# Altium PCB F17_Kiraly_Krisztina.PcbDoc
Units mm, origin at the board's own origin, x right, y up, seen from the top; angles counter-clockwise.
Board outline 90.17 x 89.08 mm, 2 copper layers (Top Layer, Bottom Layer); 27 components, 50 nets, 205 pads, 52 vias.
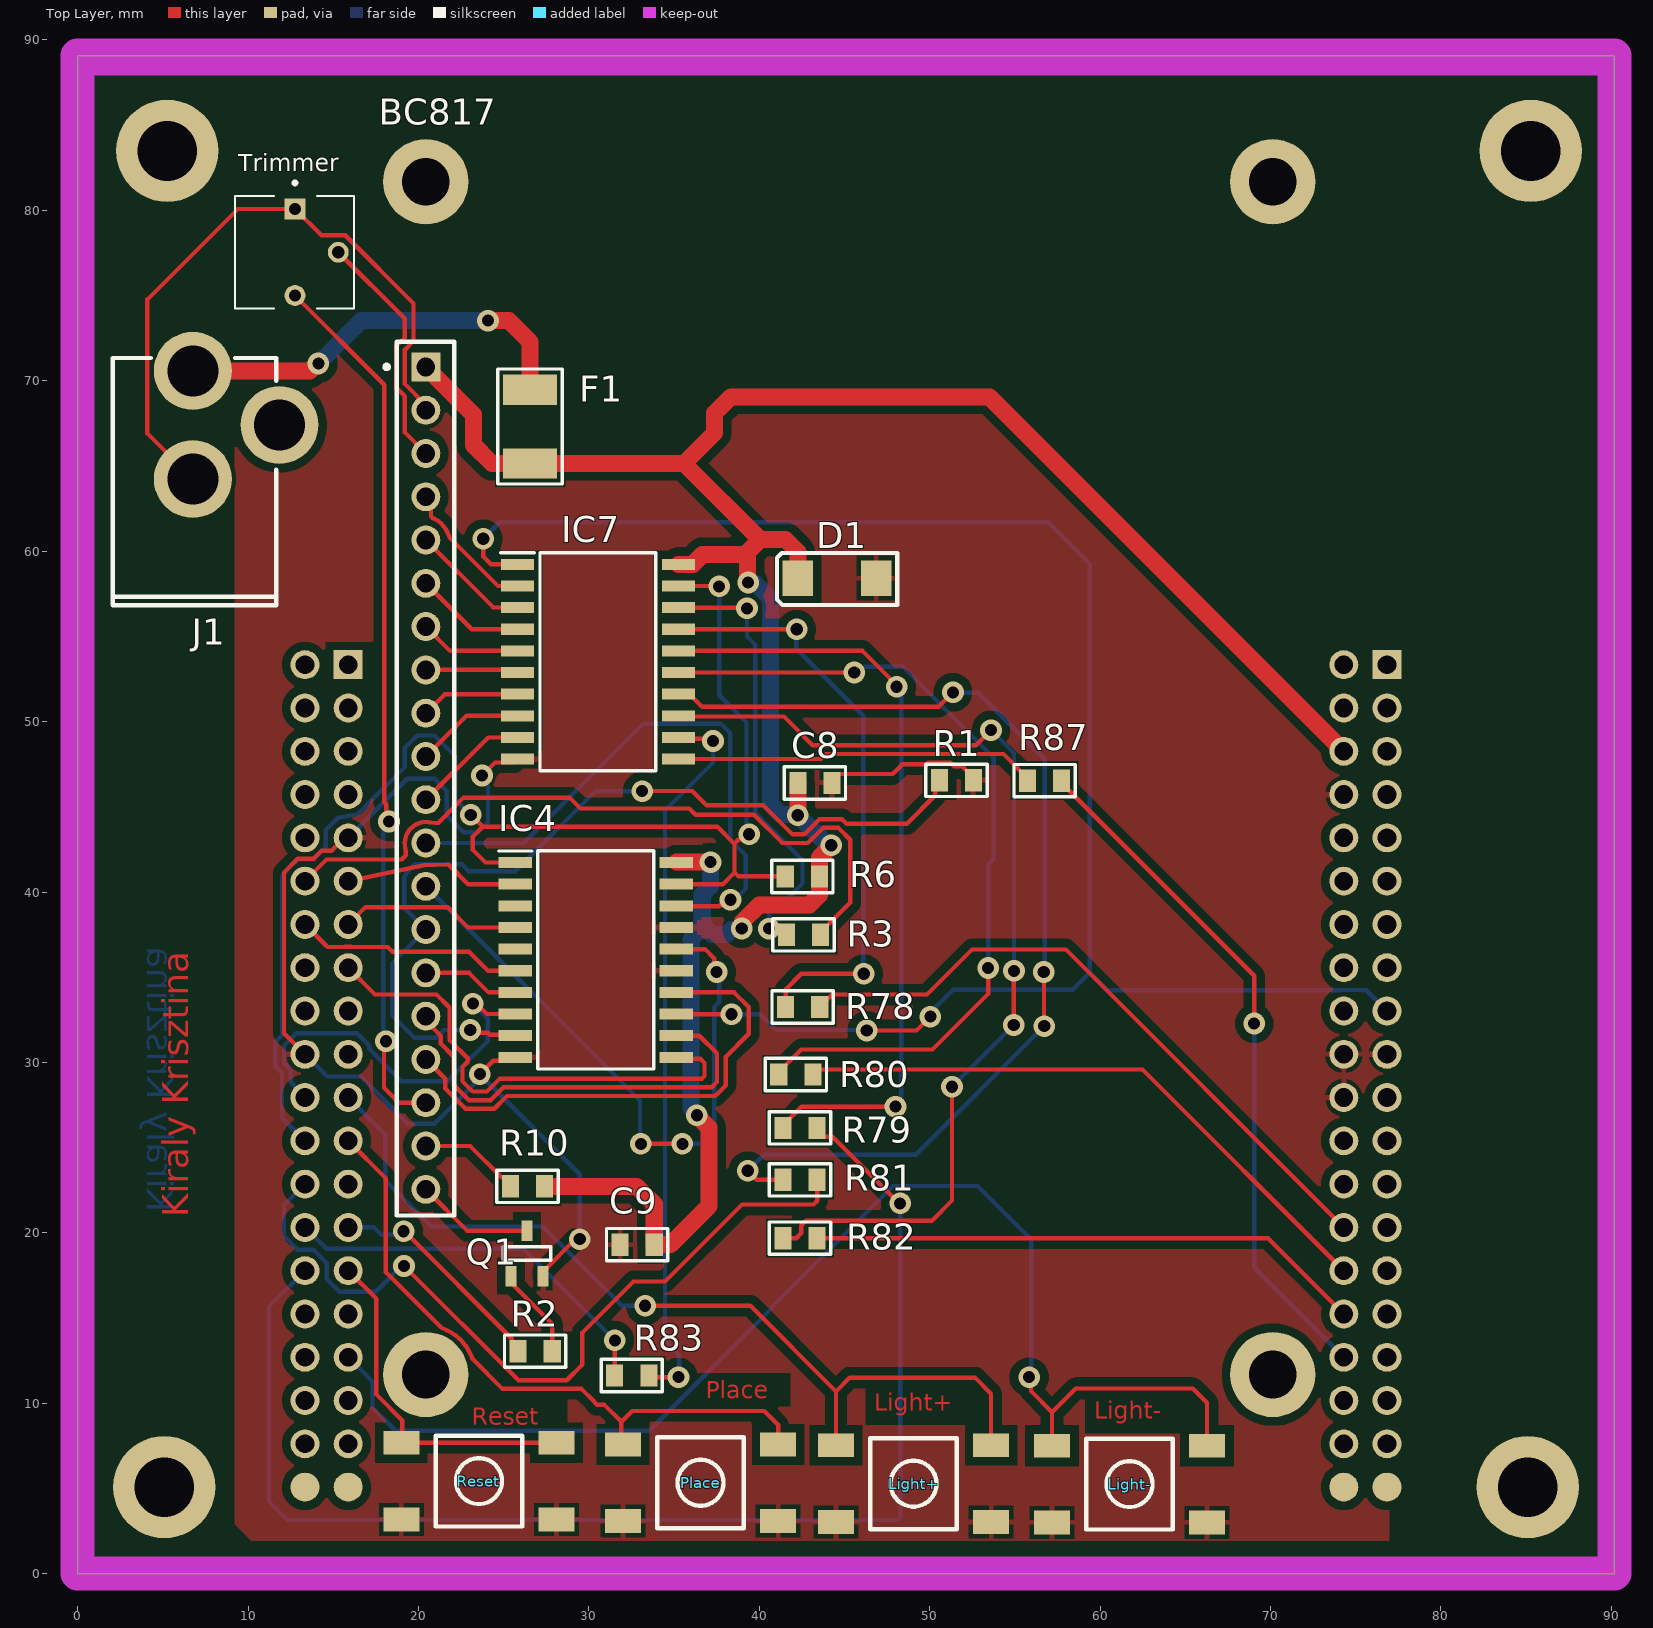
[diagram p0: Top Layer view]
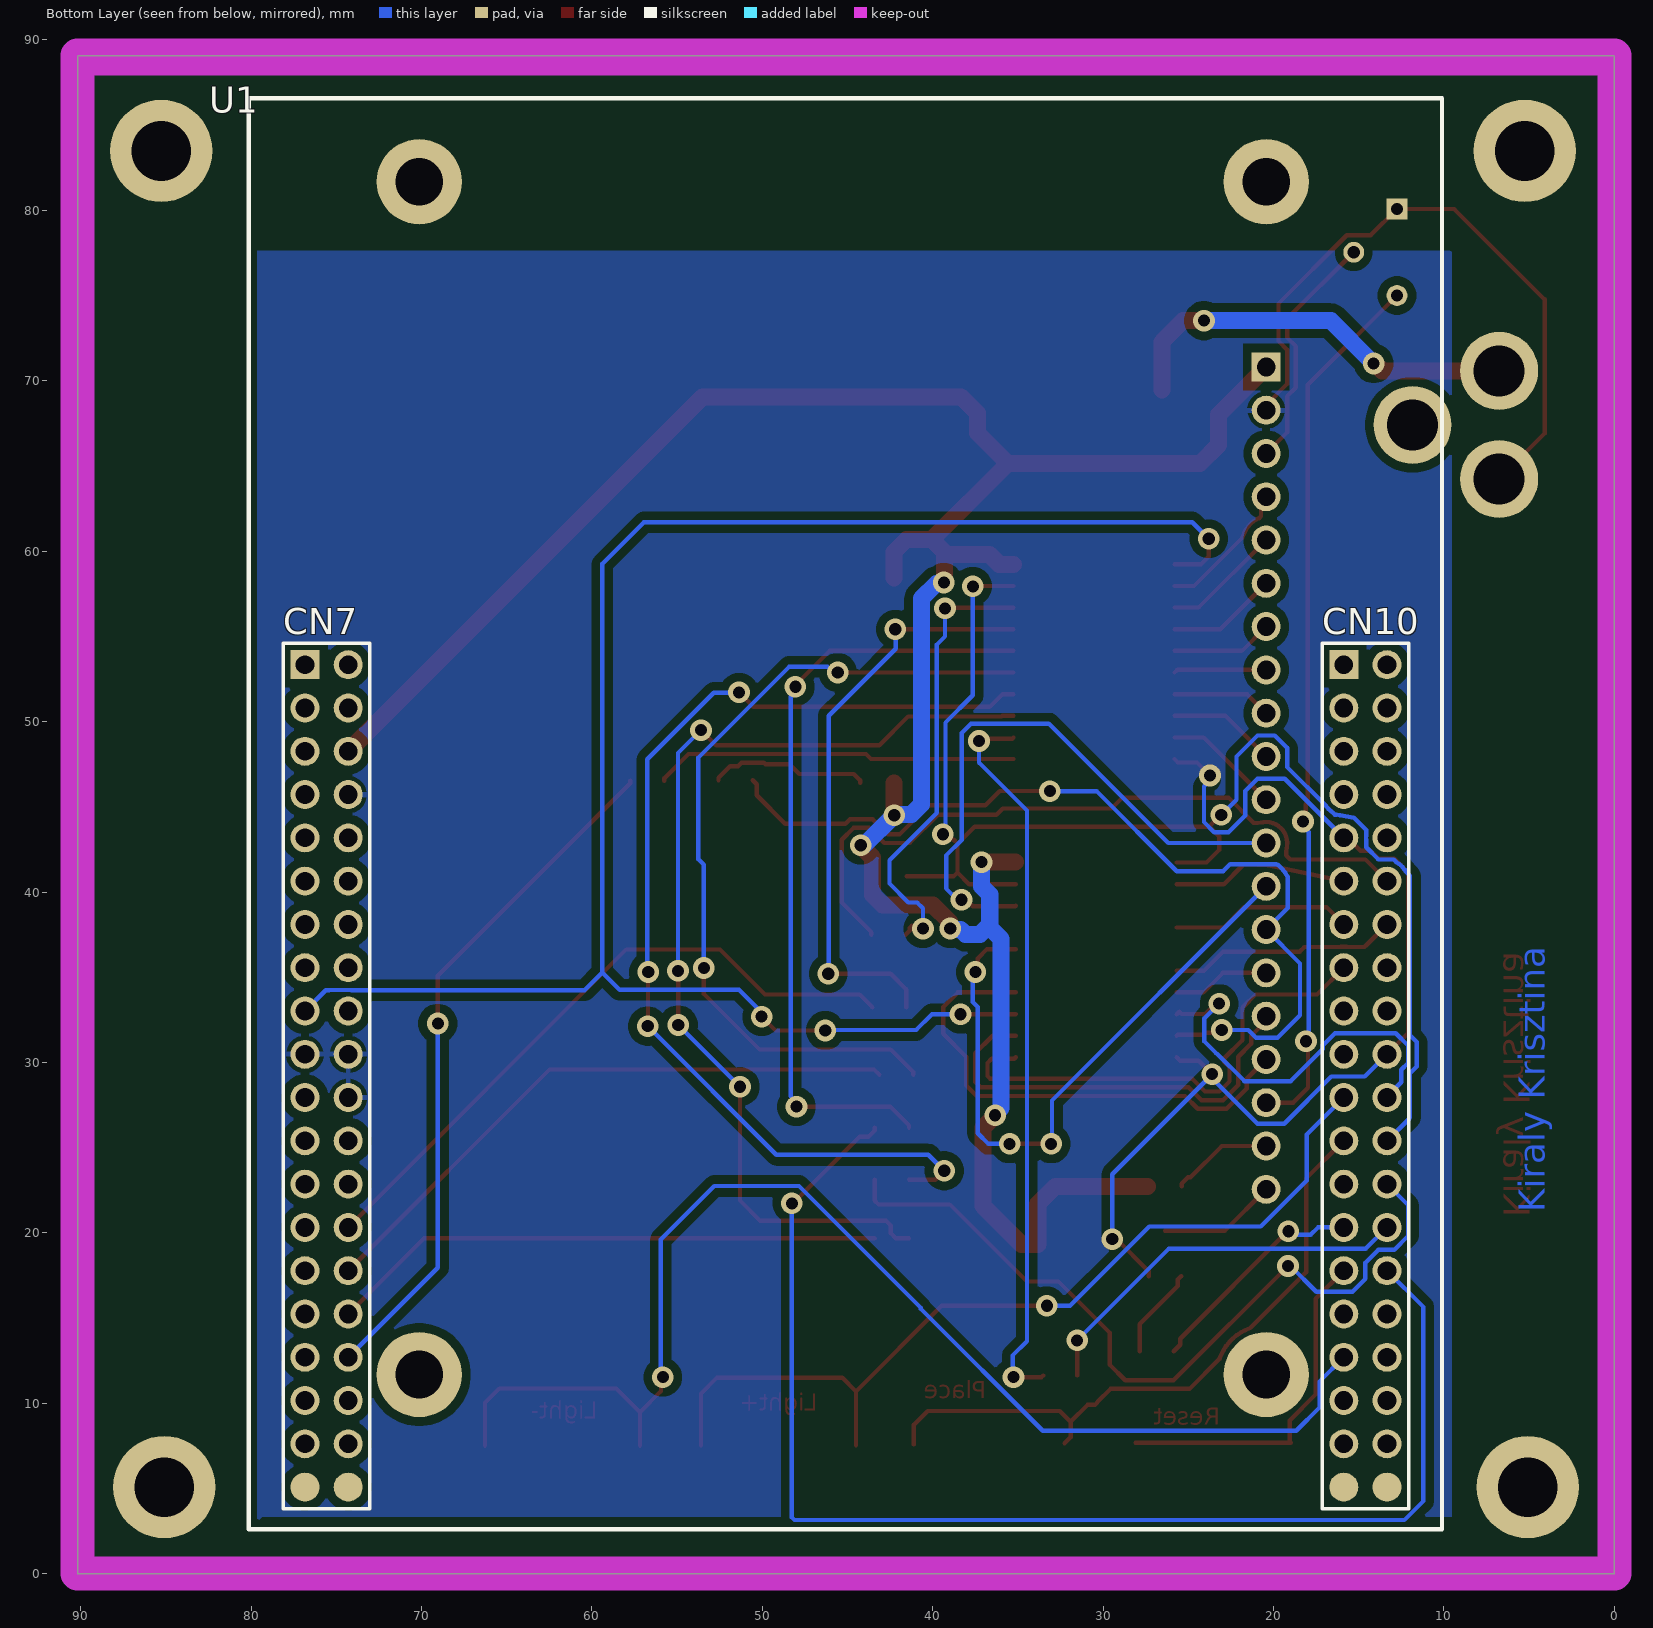
[diagram p1: Bottom Layer view, seen from below]
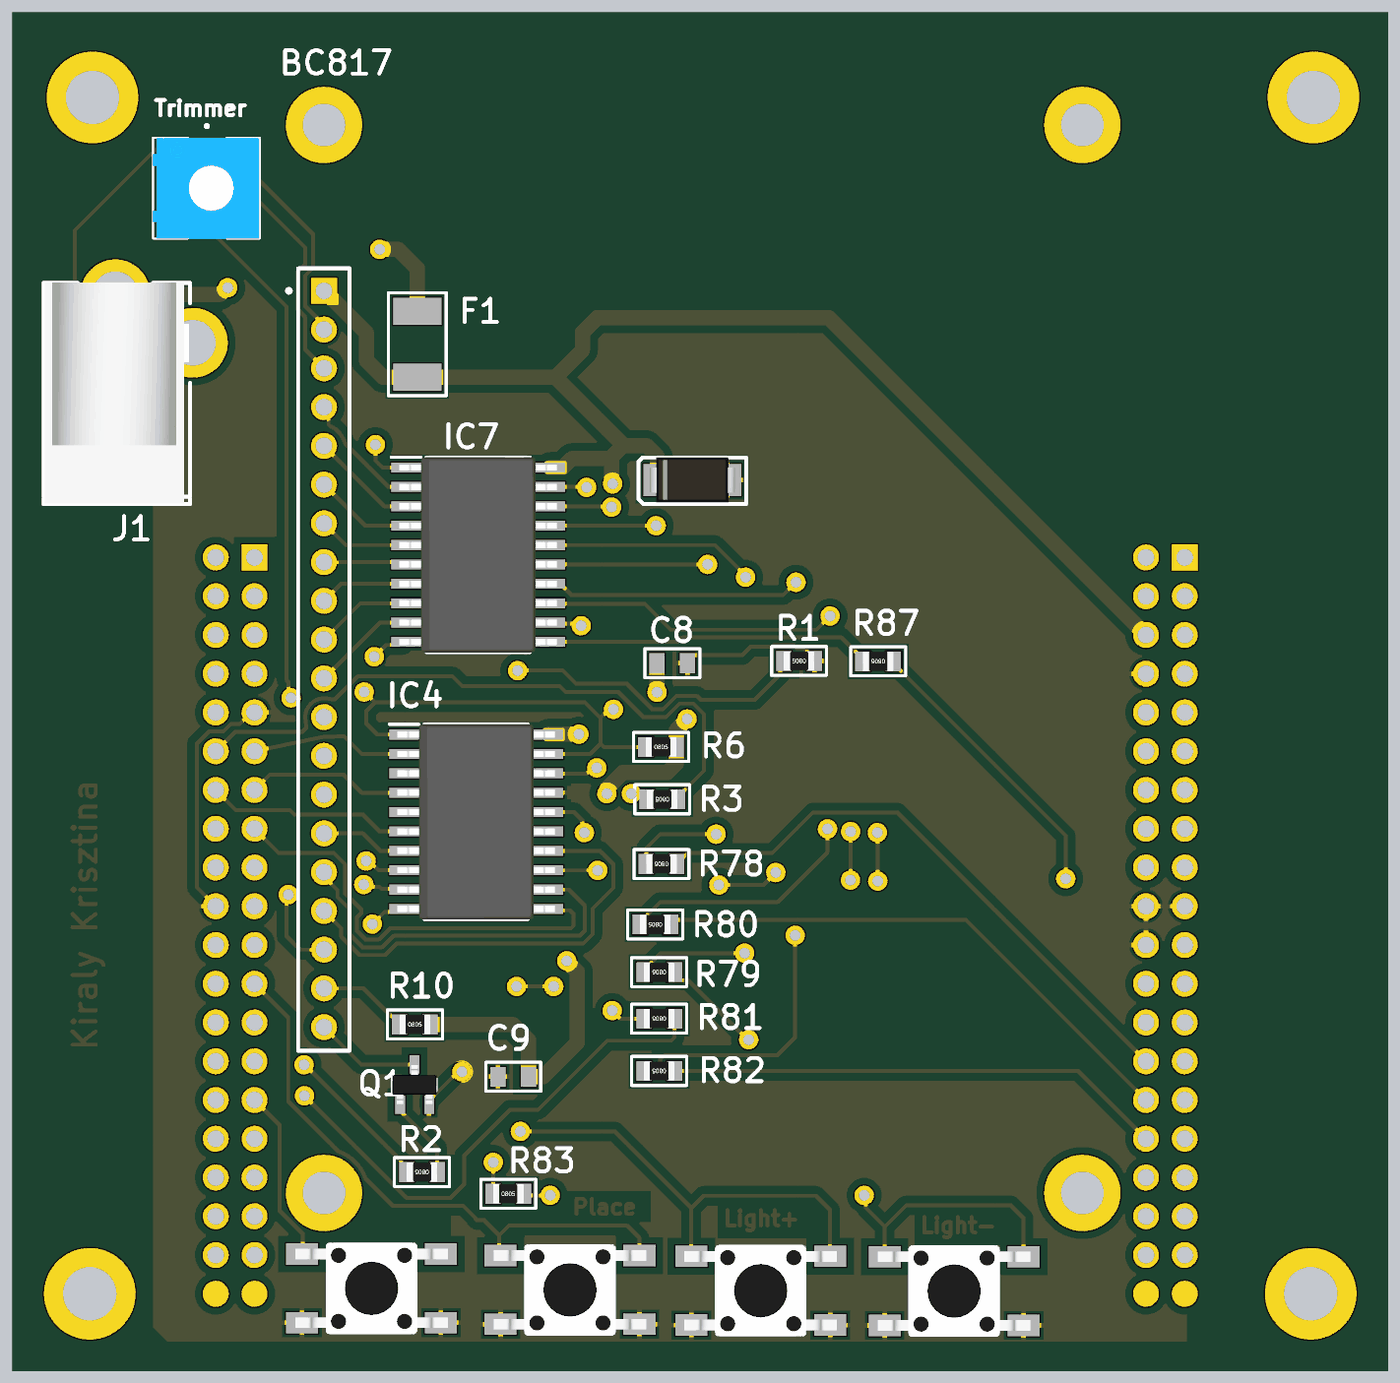
[diagram p2: 3D render of the assembled board from above, using the file's embedded part models]

## Layer stack, top to bottom
Top Solder: solder mask 0.0102, Solder Resist, Dk 3.5
Top Layer: signal copper 0.0356
Dielectric 1: dielectric 0.32, FR-4, Dk 4.8
Bottom Layer: signal copper 0.0356
Bottom Solder: solder mask 0.0102, Solder Resist, Dk 3.5

## Board outline
0,0 90.17,0 90.17,89.078 0,89.078

## Design rules (kind name [scope] priority, off if disabled: settings)
BoardOutlineClearance [All] p1: gap=0.5 ignorepadtopadclearanceinfootprint=FALSE
Clearance [All] p1: gap=0.254 ignorepadtopadclearanceinfootprint=FALSE except(0.508: Arc-Poly Track-Poly SMDPad-Poly THPad-Poly Via-Poly Fill-Poly Poly-Poly)
ComponentClearance [All] p1: gap=0.254 collisioncheckmode=3 verticalgap=0.2 showdistances=FALSE donotcheckwithout3dbody=TRUE
DiffPairsRouting [All] p1: maxlimit=0.25 minlimit=0.25 mostfreqgap=0.25 toplayer_minwidth=0.3 toplayer_maxwidth=0.38 toplayer_prefwidth=0.38 bottomlayer_minwidth=0.3 bottomlayer_maxwidth=0.38 bottomlayer_prefwidth=0.38 maxuncoupledlength=12.7
HoleSize [All] p1: absolutevalues=TRUE maxlimit=2539.975 minlimit=0.4 maxpercent=80.000 minpercent=20.000
HoleSize Via [IsVia] p2: absolutevalues=TRUE maxlimit=3.5 minlimit=0.75 maxpercent=80.000 minpercent=20.000
HoleToHoleClearance [All] p1: gap=0.25 allowstackedmicrovias=TRUE
MinimumAnnularRing [All] p1: minimumring=0.2
MinimumSolderMaskSliver [All] p1: minsoldermaskwidth=0.05
PlaneClearance [All] p1: clearance=0.5
PlaneConnect [All] p1: pad.planeconnectstyle=Relief pad.reliefexpansion=0.5 pad.reliefentries=4 pad.reliefconductorwidth=0.3 pad.reliefairgap=0.25 via.planeconnectstyle=Direct via.reliefexpansion=0.508 via.reliefentries=4 via.reliefconductorwidth=0.254 via.reliefairgap=0.254
PolygonConnect [All] p1: thpad.connectstyle=Relief thpad.reliefconductorwidth=0.3 thpad.reliefentries=4 thpad.polygonreliefangle="90 Angle" thpad.airgapwidth=0.25 smdpad.connectstyle=Relief smdpad.reliefconductorwidth=0.3 smdpad.reliefentries=4 smdpad.polygonreliefangle="90 Angle" smdpad.airgapwidth=0.25 via.connectstyle=Direct via.reliefconductorwidth=0.254 via.reliefentries=4 via.polygonreliefangle="90 Angle" via.airgapwidth=0.254
RoutingVias [All] p1: holewidth=0.711 width=1.27 viastyle="Through Hole" minholewidth=0.711 minwidth=1.143 maxholewidth=0.762 maxwidth=1.27
SilkToSilkClearance [All] p1: silktosilkclearance=0.1
SilkToSolderMaskClearance [IsPad] p1: minsilkscreentomaskgap=0.1 clearancetoexposedcopper=TRUE
SolderMaskExpansion [All] p1: expansion=0.1 istentingtop=FALSE
Width 5+ [InNet('+5')] p1: maxlimit=1 minlimit=1 preferedwidth=1 minimp=50.000000 maximp=50.000000 favimp=50.000000
Width Táp [InNet('NetF1_1')] p2: maxlimit=1 minlimit=1 preferedwidth=1 minimp=50.000000 maximp=50.000000 favimp=50.000000
Width [All] p3: maxlimit=0.254 minlimit=0.254 preferedwidth=0.254
21 further rules are at their usual default settings.

## Components (designator, comment, footprint, x,y, rotation, side; value= is the part's Value field where it differs from the comment)
BC817 "LCD Screen" FP_LCD 20.429,70.816 r270 top locked
C8 "100nF" FP_0805_CAP_085 43.256,46.406 r0 top locked
C9 "100nF" FP_0805_CAP_085 32.833,19.304 r0 top locked
D1 "9" FP_SMA 44.563,58.42 r180 top locked
F1 "Fuse" FP_MULTIFUSE 26.543,69.469 r270 top locked
IC4 "SN74HCT244DW" SOIC127P1030X265-20N 30.404,36.017 r0 top locked
IC7 "SN74HCT245DW" SOIC127P1030X265-20N 30.531,53.518 r0 top locked
J1 "2.xmm" FP_DC_TAP_ANYA 6.756,70.587 r180 top
Light+ "Button" FP_BTN_SMD 49.047,5.283 r90 top (schematic designator B3)
Light- "Button" FP_BTN_SMD 61.722,5.258 r90 top (schematic designator B2)
Place "Button" FP_BTN_SMD 36.551,5.334 r90 top (schematic designator B1)
Q1 "NMOS" FP_SOT23-3 26.365,18.79 r270 top locked
R1 "10K" FP_0805_RES 51.562,46.558 r180 top locked
R2 "1K" FP_0805_RES 26.848,13.056 r180 top locked
R3 "1K" FP_0805_RES 42.596,37.49 r180 top
R6 "100K" FP_0805_RES 42.52,40.919 r0 top
R10 "30" FP_0805_RES 26.391,22.733 r0 top locked
R78 "1K" FP_0805_RES 42.545,33.249 r180 top
R79 "1K" FP_0805_RES 42.393,26.162 r180 top locked
R80 "1K" FP_0805_RES 42.139,29.286 r180 top locked
R81 "1K" FP_0805_RES 42.393,23.114 r180 top locked
R82 "1K" FP_0805_RES 42.393,19.685 r180 top locked
R83 "1K" FP_0805_RES 32.512,11.633 r0 top locked
R87 "1K" FP_0805_RES 56.744,46.533 r180 top locked
Reset "Button" FP_BTN_SMD 23.546,5.436 r90 top (schematic designator B4)
Trimmer "" TRIM_3362P-1-502 12.751,77.546 r270 top locked
U1 "NUCLEO-F446RE" FP_NUCLEO-64_2x20 76.835,53.34 r180 bottom locked

## Footprints (in the part's own frame and the unit in brackets; to place one, negate y for a bottom-side part, rotate by r counter-clockwise, add the part's x,y. Pads: shape width x height; smd on the part's side, far side on the other; paste and mask are expansions set on the pad)
FP_0805_CAP_085 [mm] "0805 kapacitás YAGEO 0.85mm magas"
  rect 1x1.3 smd: 1(-1,0) 2(1,0)
  silkscreen extent -1.8,-0.95 1.8,0.95, body extent -1,-0.64 1.03,0.64, height 0.85
FP_0805_RES [mm] "0805 ellenállás"
  rect 1x1.3 smd: 1(-1,0) 2(1,0)
  silkscreen extent -1.8,-0.95 1.8,0.95, body extent -1,-0.62 1,0.63, height 0.62
FP_BTN_SMD [mm] "SMD Push Button 6x6mm"
  rect 1.4x2.1 smd: 1(2.25,4.55) 2(2.25,-4.55) 3(-2.25,4.55) 4(-2.25,-4.55)
  silkscreen extent -2.67,-2.54 2.67,2.54, body extent -3,-5 3,5, height 5.1
FP_DC_TAP_ANYA [mil] "DC HEBA25 TÁPFESZÜLTSÉG ALJZAT ZÁRT, NYÁKBA 90°"
  round 180 hole 118: 1(0,0) 2(0,250) 3(-200,125)
  silkscreen extent -193,-30 185,541, body extent -190,-31 183,539, height 440
FP_LCD [mm]
  rect 1.7x1.7 hole 1.1: 1(0,0)
  round 1.7 hole 1.1: 2(2.54,0) 3(5.08,0) 4(7.62,0) 5(10.16,0) 6(12.7,0) 7(15.24,0) 8(17.78,0) 9(20.32,0) 10(22.86,0) 11(25.4,0) 12(27.94,0) 13(30.48,0) 14(33.02,0) 15(35.56,0) 16(38.1,0) 17(40.64,0) 18(43.18,0) 19(45.72,0) 20(48.26,0)
  round 5 hole 2.8: ""(-10.87,49.7) ""(-10.87,0) ""(59.13,49.7) ""(59.13,0)
  silkscreen extent -1.47,-2.4 49.8,1.67, body extent -13.37,-3 61.63,52.2, height 17.6
FP_MULTIFUSE [mm] "POLYFUSE SMD 1812"
  rect 1.78x3.15 smd: 1(0,0) 2(4.318,0)
  silkscreen extent -1.22,-1.9 5.53,1.9, body extent -0.12,-1.71 4.57,1.71, height 1
FP_NUCLEO-64_2x20 [mm]
  round 1.7 all layers, no hole: 0(0,-48.26) 0(2.54,-48.26) 0(60.96,-48.26) 0(63.5,-48.26)
  rect 1.7x1.7 hole 1.1: 1(0,0) 39(60.96,0)
  round 1.7 hole 1.1: 2(2.54,0) 3(0,-2.54) 4(2.54,-2.54) 5(0,-5.08) 6(2.54,-5.08) 7(0,-7.62) 8(2.54,-7.62) 9(0,-10.16) 10(2.54,-10.16) 11(0,-12.7) 12(2.54,-12.7) 13(0,-15.24) 14(2.54,-15.24) 15(0,-17.78) 16(2.54,-17.78) 17(0,-20.32) 18(2.54,-20.32) 19(0,-22.86) 20(2.54,-22.86) 21(0,-25.4) 22(2.54,-25.4) 23(0,-27.94) 24(2.54,-27.94) 25(0,-30.48) 26(2.54,-30.48) 27(0,-33.02) 28(2.54,-33.02) 29(0,-35.56) 30(2.54,-35.56) 31(0,-38.1) 32(2.54,-38.1) 33(0,-40.64) 34(2.54,-40.64) 35(0,-43.18) 36(2.54,-43.18) 37(0,-45.72) 38(2.54,-45.72) 40(63.5,0) 41(60.96,-2.54) 42(63.5,-2.54) 43(60.96,-5.08) 44(63.5,-5.08) 45(60.96,-7.62) 46(63.5,-7.62) 47(60.96,-10.16) 48(63.5,-10.16) 49(60.96,-12.7) 50(63.5,-12.7) 51(60.96,-15.24) 52(63.5,-15.24) 53(60.96,-17.78) 54(63.5,-17.78) 55(60.96,-20.32) 56(63.5,-20.32) 57(60.96,-22.86) 58(63.5,-22.86) 59(60.96,-25.4) 60(63.5,-25.4) 61(60.96,-27.94) 62(63.5,-27.94) 63(60.96,-30.48) 64(63.5,-30.48) 65(60.96,-33.02) 66(63.5,-33.02) 67(60.96,-35.56) 68(63.5,-35.56) 69(60.96,-38.1) 70(63.5,-38.1) 71(60.96,-40.64) 72(63.5,-40.64) 73(60.96,-43.18) 74(63.5,-43.18) 75(60.96,-45.72) 76(63.5,-45.72)
  silkscreen extent -3.3,-50.72 66.72,33.25, body extent -3.3,-50.72 66.72,33.25, height 11
FP_SMA [mm] "SMA footprint"
  rect 1.8x2.1 smd: 1(-2.3,0) 2(2.3,0)
  silkscreen extent -3.52,-1.48 3.52,1.58, body extent -2.8,-1.47 2.8,1.48, height 2.7
FP_SOT23-3 [mm] "SOT23-3 tok"
  rect 1.2x0.65 smd: 1(1.327,-0.95) 2(1.327,0.95) 3(-1.327,0)
  silkscreen extent -0.4,-1.4 0.4,1.4, body extent -1.27,-1.46 1.27,1.46, height 0.97
SOIC127P1030X265-20N [mm]
  rect 1.95x0.65 smd: 1(-4.725,5.715) 2(-4.725,4.445) 3(-4.725,3.175) 4(-4.725,1.905) 5(-4.725,0.635) 6(-4.725,-0.635) 7(-4.725,-1.905) 8(-4.725,-3.175) 9(-4.725,-4.445) 10(-4.725,-5.715) 11(4.725,-5.715) 12(4.725,-4.445) 13(4.725,-3.175) 14(4.725,-1.905) 15(4.725,-0.635) 16(4.725,0.635) 17(4.725,1.905) 18(4.725,3.175) 19(4.725,4.445) 20(4.725,5.715)
  silkscreen extent -5.7,-6.4 3.4,6.4, body extent -5.16,-6.4 5.16,6.4, height 1.75
TRIM_3362P-1-502 [mm]
  rect 1.222x1.222 hole 0.714: 1(-2.54,0)
  round 1.222 hole 0.714: 2(0,2.54) 3(2.54,0)
  silkscreen extent -4.16,-3.53 3.3,3.47, body extent -3.3,-3.55 3.3,3.44, height 4.88

## Part data
C8 C9: library part CAP, "Capacitor", Name="100nF 0805 10% 50V X7R 0805B104K500NT (FNG)", Reference=82-13-46, Supplier=Lomex
D1: library part ZENER, "Zener Diode", Name="VISHAY SMAJ5.0A-E3/61", Reference=9550941, Supplier=Farnell, U_Z=24
IC4: "Integrated Circuit", Manufacturer_Name="Texas Instruments", Mouser Part Number=595-SN74HCT244DW, Arrow Part Number=SN74HCT244DW, Arrow Price/Stock=https://www.arrow.com/en/products/sn74hct244dw/texas-instruments?region=nac, Datasheet Link=http://www.ti.com/lit/ds/symlink/sn74hct244.pdf, Height=2.65mm, Manufacturer_Part_Number=SN74HCT244DW, Mouser Price/Stock=https://www.mouser.co.uk/ProductDetail/Texas-Instruments/SN74HCT244DW?qs=8yeEWhuAOtPaf02S2l6zdA%3D%3D, Name="TEXAS INSTRUMENTS SN74HCT244DWR", Reference=3006172, Supplier=Farnell
IC7: "Integrated Circuit", Manufacturer_Name="Texas Instruments", Mouser Part Number=595-SN74HCT245DW, Arrow Part Number=SN74HCT245DW, Arrow Price/Stock=https://www.arrow.com/en/products/sn74hct245dw/texas-instruments?region=nac, Datasheet Link=http://www.ti.com/lit/ds/symlink/sn74hct245.pdf, Height=2.65mm, Manufacturer_Part_Number=SN74HCT245DW, Mouser Price/Stock=https://www.mouser.co.uk/ProductDetail/Texas-Instruments/SN74HCT245DW?qs=5h8QSfodyRguwsnqzMvAgw%3D%3D, Name="74HCT245D (NXP) 8xBIDIRECTIONAL BUS TRANSCEIVER 3-STATE OUTPUT SO-20 WIDE", Reference=87-06-35, Supplier=Lomex
J1: library part DC_TAP_ANYA, "2.xmm DC HEBA25 TÁPFESZÜLTSÉG ALJZAT ZÁRT, NYÁKBA 90°", Name="TÁP DC ANYA 5.5/2.1/9.5mm DCS-5521-5", Reference=43-07-67, Supplier=Lomex
Light+ Light- Place Reset: library part "Button 4P", "Push button", Name="ALCOSWITCH - TE CONNECTIVITY FSM1LPTR", Reference=2610937, Supplier=Farnell
Q1: "NXP - BSP030,115 - MOSFET, N CH, 30V, 10A, SOT223", Name="2N7002 (NXP) N-FET 60V 0.3A 0.83W Rds<5R SOT-23 ˝12W˝ (SN7002)", Reference=86-00-97, Supplier=Lomex
R1 R2 R3 R6 R10 R78 R79 R80 R81 R82 R83 R87: library part RES, "Resistor", Supplier=Lomex
  R1: Name="10K0 0805 5% RS-05K103JT 0.125W (FNG)", Reference=81-35-05
  R2 R3 R78 R79 R80 R81 R82 R83 R87: Name="1K00 0805 5% CR-05JL7----1K 0.125W (VIK)", Reference=81-10-87
  R6: Name="100K 0805 5% CR-05JL7--100K 0.125W (VIK)", Reference=81-11-11
  R10: Name="30R0 0805 5% WR08X300JTL 0.125W (WAL)", Reference=81-29-89
Trimmer: library part Trimmer, Name="5K00 3362P-502R (KIC) 6.6x7mm 1#-1# CERMET FEKVÖ", Reference=05-06-68, Supplier=Lomex
BC817: Name=RG12864A-BIW-V, Reference=TME, Supplier=Tanszék
F1: Name="1.1A 33V 1812L110/33MR POLYFUSE SMD 1812 (LFS) ˝LF110-33˝", Reference=44-03-25, Supplier=Lomex
U1: Name="Nucleo F446RE", Reference=NUCLEO, Supplier=Tanszék

## Free pads (board coordinates)
  round 6 hole 3.5: ""(5.08,5.08) ""(5.258,83.49) ""(85.09,5.08) ""(85.268,83.49)

## Via types
v1: diameter 1.27, hole 0.711, Top Layer to Bottom Layer, 52 vias

## Nets (pads, with @x,y where several pads share a name; then routed paths per layer and width w, separated by ;. In a path a pad name is that pad's centre, name@x,y a point inside that pad or via, vN(x,y) a via of type N, cw(c..) or ccw(c..) an arc to the next point about the centre after c; other vN are vias at no path point)
+5: BC817.1 C8.1 C9.2 D1.2 F1.2 IC4.20 IC7.20 R6.2 R10.2 U1.6 | length 153.8
  Top Layer w1: BC817.1 23.216,68.03 23.216,66.243 24.308,65.151 F1.2 35.585,65.151 ; R10.2 32.791,22.733 33.833,21.692 C9.2 34.773,19.304 37.033,21.565 37.033,26.178 36.335,26.876 v1(36.335,26.899) ; IC4.20@35.153,41.757 v1(37.134,41.757) ; IC7.20 36.093,59.233 36.678,59.817 39.192,59.817 ; v1(38.964,37.858) 39.016,37.909 39.016,38.266 39.994,39.243 42.934,39.243 43.52,39.829 R6.2 43.52,42.013 44.221,42.715 v1(44.221,42.748) ; v1(39.345,58.166) 39.293,58.218 39.293,59.716 39.192,59.817 ; v1(42.256,44.506) C8.1 ; D1.2 42.263,59.947 41.529,60.681 40.056,60.681 ; U1.6 53.492,69.063 38.329,69.063 37.363,68.097 37.363,66.929 35.585,65.151 ; 35.585,65.151 40.056,60.681 ; 39.192,59.817 40.056,60.681
  Bottom Layer w1: v1(36.335,26.899) 36.335,26.972 35.979,27.327 35.979,37.244 36.741,38.005 ; v1(37.134,41.757) 37.134,40.341 36.648,39.855 36.648,38.098 36.741,38.005 ; v1(38.964,37.858) 38.913,37.806 38.356,37.806 38.063,37.512 37.234,37.512 36.741,38.005 ; v1(39.345,58.166) 39.396,58.114 39.77,58.114 40.665,57.219 40.665,45.144 41.251,44.558 42.205,44.558 v1(42.256,44.506) ; v1@42.234,44.418 42.344,44.418 43.963,42.8 44.17,42.8 v1(44.221,42.748)
GND: BC817.2 C8.2 C9.1 D1.1 IC4.10 IC4.15 IC4.17 IC7.10 J1.2 Light+.3 Light+.4 Light-.3 Light-.4 Place.3 Place.4 Q1.2 R1.1 Reset.3 Reset.4 Trimmer.1 U1.8 U1.19 U1.20 U1.22 U1.47 U1.58 | length 112.9
  Top Layer w0.254: J1.2 4.089,66.904 4.089,74.778 9.398,80.086 Trimmer.1 14.299,78.538 15.702,78.538 19.706,74.533 19.706,72.332 19.198,71.824 19.198,69.809 20.429,68.578 BC817.2 BC817.2@20.649,68.276 ; U1.58 12.104,31.711 12.104,41.15 12.903,41.949 13.845,41.949 14.314,42.418 14.896,42.418 15.658,43.18 U1.47 ; v1(23.597,29.312) 24.389,30.104 25.481,30.104 IC4.10 ; v1@23.876,46.685 v1(23.724,46.838) 24.491,47.605 25.608,47.605 IC7.10 ; Q1.2 27.315,17.738 29.212,19.634 v1(29.464,19.634) ; C8.2 44.256,46.556 44.629,46.929 47.825,46.929 48.394,47.498 49.813,47.498 49.904,47.589 51.22,47.589 51.424,47.385 51.885,47.385 52.562,46.708 R1.1
  Bottom Layer w0.254: U1.58 14.644,29.171 16.604,29.171 19.37,26.405 20.939,26.405 23.597,29.063 v1(23.597,29.312) 29.464,23.444 v1(29.464,19.634) ; U1.47 19.342,46.647 20.939,46.647 21.66,45.926 21.66,44.492 22.642,43.51 23.484,43.51 24.079,44.105 24.079,46.207 23.724,46.563 v1(23.724,46.838)
NetBC817_3: BC817.3 Trimmer.2 | length 14.4
  Top Layer w0.254: Trimmer.2 19.198,73.639 19.198,72.543 18.69,72.035 18.69,69.598 19.198,69.09 19.198,66.967 BC817.3
NetBC817_4: BC817.4 IC7.2 | length 8.1
  Top Layer w0.254: BC817.4 20.729,62.896 20.729,62.049 20.842,61.936 cw(c20.452,60.771) 21.329,61.632 cw(c19.842,60.173) 21.821,60.825 21.83,60.797 21.873,60.754 24.663,57.963 IC7.2
NetBC817_5: BC817.5 IC7.3 | length 7
  Top Layer w0.254: BC817.5 24.393,56.693 IC7.3
NetBC817_6: BC817.6 IC7.4 | length 6.5
  Top Layer w0.254: BC817.6 23.123,55.423 IC7.4
NetBC817_7: BC817.7 IC7.5 | length 6
  Top Layer w0.254: BC817.7 21.853,54.153 IC7.5
NetBC817_8: BC817.8 IC7.6 | length 5.4
  Top Layer w0.254: BC817.8 25.652,53.036 IC7.6
NetBC817_9: BC817.9 IC7.7 | length 5.8
  Top Layer w0.254: BC817.9 21.546,51.613 IC7.7
NetBC817_10: BC817.10 IC7.8 | length 6.4
  Top Layer w0.254: BC817.10 22.816,50.343 IC7.8
NetBC817_11: BC817.11 IC7.9 | length 6.9
  Top Layer w0.254: BC817.11 24.086,49.073 IC7.9
NetBC817_12: BC817.12 IC4.18 | length 35
  Top Layer w0.254: IC4.18 35.161,39.16 37.643,39.16 38.032,39.549 v1(38.307,39.549)
  Bottom Layer w0.254: BC817.12 26.176,42.876 33.18,49.881 37.749,49.881 38.298,49.332 38.298,43.054 39.211,42.142 39.211,40.214 38.547,39.549 v1(38.307,39.549)
NetBC817_13: BC817.13 IC4.16 | length 37.9
  Top Layer w0.254: v1(33.045,25.222) v1(35.484,25.222) ; IC4.16 36.806,36.652 37.357,36.102 37.357,35.439 v1(37.49,35.306)
  Bottom Layer w0.254: BC817.13 32.995,27.771 32.995,25.273 v1(33.045,25.222) ; v1(35.484,25.222) 36.728,25.222 37.351,25.845 37.351,33.25 37.644,33.544 37.644,35.152 v1(37.49,35.306)
NetBC817_14: BC817.14 IC4.9 R1.2 | length 54.4
  Top Layer w0.254: v1(23.038,31.902) 23.19,31.75 24.054,31.75 24.181,31.623 25.628,31.623 IC4.9 ; v1(33.122,45.923) 33.133,45.934 36.065,45.934 36.914,45.085 40.241,45.085 41.943,43.383 42.636,43.383 43.525,44.272 44.853,44.272 45.126,43.999 48.647,43.999 50.324,45.676 50.324,46.32 R1.2
  Bottom Layer w0.254: v1(23.038,31.902) 21.478,31.902 21.021,31.445 19.761,31.445 18.44,32.766 18.44,35.807 BC817.14 19.234,38.992 19.159,39.066 19.159,40.813 19.159,40.873 19.187,40.927 cw(c19.413,40.813) 19.188,40.93 cw(c21.072,39.939) 19.711,41.576 cw(c19.873,41.38) 19.873,41.634 22.545,41.634 22.954,41.224 25.679,41.224 30.378,45.923 v1(33.122,45.923)
NetBC817_16: BC817.16 IC4.12 | length 25.5
  Top Layer w0.254: BC817.16 20.429,32.434 21.311,31.553 21.311,31.423 21.311,31.376 21.311,31.1 22.073,30.338 22.073,28.68 22.965,27.788 24.228,27.788 24.983,28.543 36.844,28.543 36.851,28.55 37.205,28.55 37.512,28.857 37.512,30.535 36.474,31.572 IC4.12
NetBC817_17: BC817.17 IC4.14 | length 29.5
  Top Layer w0.254: BC817.17 21.565,29.041 21.565,28.47 22.755,27.28 24.438,27.28 25.194,28.035 37.408,28.035 38.024,28.651 38.024,30.328 39.383,31.687 39.383,33.25 38.521,34.112 IC4.14
NetBC817_18: BC817.18 Trimmer.3 | length 51.9
  Top Layer w0.254: Trimmer.3 17.983,69.774 17.983,45.281 18.11,45.154 18.11,44.298 v1(18.27,44.138) ; v1(18.09,31.242) 17.971,31.122 17.971,28.511 18.846,27.636 BC817.18
  Bottom Layer w0.254: v1(18.09,31.242) 17.932,31.4 17.932,43.526 18.27,43.863 v1(18.27,44.138)
NetBC817_19: BC817.19 R10.1 | length 6
  Top Layer w0.254: BC817.19 23.028,25.096 24.866,23.258 25.016,23.258 25.391,22.883 R10.1
NetBC817_20: BC817.20 Q1.3 | length 6.9
  Top Layer w0.254: BC817.20 22.868,20.117 Q1.3
NetF1_1: F1.1 J1.1 | length 25
  Top Layer w1: J1.1 13.618,70.587 14.049,71.018 v1(14.122,71.018) ; v1(24.079,73.533) 25.298,73.533 26.543,72.288 F1.1
  Bottom Layer w1: J1.1 J1.1@7.137,70.967 ; v1@14.071,70.967 v1(14.122,71.018) 16.637,73.533 v1(24.079,73.533)
NetIC4_1: IC4.1 IC4.19 IC7.19 R6.1 U1.62 | length 83.4
  Top Layer w0.254: v1(23.063,44.526) 23.089,44.526 23.774,43.84 ; IC4.1 23.927,41.732 23.19,42.469 23.19,43.256 23.774,43.84 ; IC4.19 37.861,40.462 38.546,41.147 ; IC7.19 37.617,57.963 v1(37.643,57.937) ; 38.545,42.826 37.531,43.84 23.774,43.84 ; v1(39.401,43.389) 39.126,43.389 38.802,43.065 38.76,43.065 38.546,42.851 38.546,41.147 ; R6.1 38.774,40.919 38.546,41.147
  Bottom Layer w0.254: U1.62 12.063,26.672 11.989,26.746 11.989,29.367 11.596,29.76 11.596,31.2 11.989,31.593 11.989,40.955 12.218,41.185 12.312,41.325 cw(c13.335,40.64) 12.65,41.663 12.79,41.756 12.943,41.91 13.843,41.91 14.558,42.625 14.558,43.021 14.562,43.087 ccw(c13.335,43.18) 14.562,43.273 14.558,43.339 14.558,43.641 15.281,44.364 16.091,44.508 ccw(c15.875,45.72) 16.113,44.512 16.279,44.545 16.401,44.545 16.522,44.666 16.618,44.738 ccw(c15.875,45.72) 16.857,44.977 16.929,45.073 19.198,47.342 19.198,48.466 19.919,49.187 20.939,49.187 22.168,47.958 22.168,45.421 v1(23.063,44.526) ; v1(37.643,57.937) 37.643,51.542 39.243,49.942 39.243,43.547 v1(39.401,43.389)
NetIC4_2: IC4.2 U1.49 | length 10.4
  Top Layer w0.254: U1.49 20.31,41.569 20.332,41.573 21.646,41.617 21.755,41.617 21.83,41.543 22.91,40.462 IC4.2
NetIC4_4: IC4.4 U1.51 | length 10.7
  Top Layer w0.254: U1.51 16.891,39.116 20.266,39.116 ccw(c20.429,40.336) 20.44,39.105 21.506,39.116 21.716,39.116 22.91,37.922 IC4.4
NetIC4_6: IC4.6 U1.52 | length 13.5
  Top Layer w0.254: U1.52 14.581,36.854 14.656,36.779 15.705,36.779 15.717,36.791 16.033,36.791 16.045,36.779 18.186,36.779 18.466,36.5 22.962,36.5 24.079,35.382 IC4.6
NetIC4_8: IC4.8 U1.60 | length 23.5
  Top Layer w0.254: v1(23.19,33.452) 23.408,33.452 24.017,32.842 25.385,32.842 25.526,32.983 IC4.8@25.679,32.829
  Bottom Layer w0.254: U1.60 13.335,28.004 12.497,28.843 12.497,29.577 12.104,29.97 12.104,30.99 12.825,31.711 16.385,31.711 17.106,30.99 17.106,30.789 18.989,28.906 21.707,28.906 23.327,30.526 23.349,30.526 24.054,31.23 24.054,32.588 v1(23.19,33.452)
NetIC4_11: IC4.11 U1.53 | length 29.2
  Top Layer w0.254: U1.53 17.449,33.986 21.056,33.986 21.744,33.298 21.819,33.223 21.819,31.31 22.883,30.246 22.883,30.035 22.581,29.732 22.581,28.891 23.176,28.296 24.017,28.296 24.773,29.051 36.63,29.051 36.779,29.2 36.779,29.972 36.536,30.216 35.215,30.216 IC4.11
NetIC4_13: IC4.13 IC7.1 U1.17 | length 108.8
  Top Layer w0.254: v1(23.8,60.731) 23.8,59.684 24.251,59.233 IC7.1 ; IC4.13 35.141,32.829 v1(38.367,32.829) ; v1(46.304,31.877) 49.225,31.877 v1(50.038,32.69)
  Bottom Layer w0.254: v1(23.8,60.731) 24.765,61.697 56.947,61.697 59.385,59.258 59.385,35.281 ; v1(38.367,32.829) 40.043,32.829 40.97,31.902 46.279,31.902 v1(46.304,31.877) ; v1(50.038,32.69) 50.038,32.942 51.361,34.265 58.369,34.265 59.385,35.281 ; U1.17 75.616,34.239 75.405,34.239 74.308,34.251 74.137,34.251 74.125,34.239 61.544,34.239 60.426,34.24 59.385,35.281
NetIC7_11: IC7.11 R87.2 | length 21.3
  Top Layer w0.254: IC7.11 43.62,47.803 43.914,48.097 54.329,48.097 55.744,46.683 R87.2
NetIC7_12: IC7.12 R83.2 | length 42.6
  Top Layer w0.254: R83.2 33.612,11.533 v1(35.253,11.533) ; IC7.12 35.332,48.997 v1@37.206,48.997
  Bottom Layer w0.254: v1(35.253,11.533) 35.306,11.586 35.306,12.802 34.468,13.64 34.468,44.78 37.282,47.595 v1(37.282,48.865)
NetIC7_13: IC7.13 R82.2 | length 60.1
  Top Layer w0.254: IC7.13 35.906,50.343 35.945,50.303 41.44,50.303 43.138,48.605 52.695,48.605 v1(53.594,49.505) ; R82.2 42.164,19.685 42.451,19.972 42.451,20.423 42.512,20.484 42.512,20.493 42.735,20.716 50.129,20.716 51.308,21.895 v1@51.308,28.473 ; v1(54.929,32.196) 54.929,35.365 v1(54.94,35.376)
  Bottom Layer w0.254: v1(51.308,28.575) v1(54.929,32.196) ; v1(53.594,49.505) 54.94,48.158 v1(54.94,35.376)
NetIC7_14: IC7.14 R81.2 | length 62.3
  Top Layer w0.254: IC7.14 35.906,51.613 36.642,50.876 50.521,50.876 v1(51.361,51.716) ; v1(39.317,23.646) 39.849,23.114 R81.2 ; v1(56.693,35.306) 56.706,35.293 56.706,32.144 v1(56.718,32.131)
  Bottom Layer w0.254: v1(39.317,23.646) 40.259,24.587 49.174,24.587 v1(56.718,32.131) ; v1(51.361,51.716) 51.388,51.689 52.846,51.689 56.744,47.792 v1@56.744,35.687
NetIC7_15: IC7.15 R80.2 | length 49.2
  Top Layer w0.254: IC7.15 v1(45.568,52.883) ; R80.2 41.139,29.436 42.462,30.759 50.165,30.759 53.426,34.02 v1(53.426,35.545)
  Bottom Layer w0.254: v1(45.568,52.883) 45.837,52.883 46.168,53.213 48.427,53.213 53.746,47.893 53.746,41.921 53.426,41.6 v1(53.426,35.545)
NetIC7_16: IC7.16 R79.2 | length 45.8
  Top Layer w0.254: IC7.16 46.05,54.153 48.057,52.146 v1(48.057,52.045) ; R79.2 41.393,26.312 42.487,27.407 v1(47.993,27.407)
  Bottom Layer w0.254: v1(47.993,27.407) 47.993,27.682 48.336,28.024 48.336,51.49 48.057,51.77 v1(48.057,52.045)
NetIC7_17: IC7.17 R78.2 | length 34.8
  Top Layer w0.254: IC7.17 v1(42.195,55.423) ; R78.2 41.545,34.288 42.462,35.204 v1(46.126,35.204)
  Bottom Layer w0.254: v1(42.195,55.423) 42.164,55.392 42.164,54.28 46.101,50.343 46.101,35.23 v1(46.126,35.204)
NetIC7_18: IC7.18 R3.2 | length 26.8
  Top Layer w0.254: IC7.18 35.264,56.684 39.236,56.684 v1(39.276,56.644) ; v1(40.569,37.854) 41.223,37.854 41.223,38.013 41.342,37.895 41.342,37.744 R3.2
  Bottom Layer w0.254: v1(39.276,56.644) 39.276,55.001 39.751,54.526 39.751,44.652 42.536,41.867 42.536,40.499 41.427,39.39 40.91,39.39 40.569,39.048 v1(40.569,37.854)
NetLight+_1: Light+.1 Light+.2 U1.59 | length 53.4
  Top Layer w0.254: v1(33.299,15.723) 39.473,15.723 44.497,10.698 ; Light+.1 44.497,10.698 ; Light+.2 53.597,10.563 52.654,11.506 45.306,11.506 44.497,10.698
  Bottom Layer w0.254: U1.59 18.047,25.768 18.047,23.075 20.752,20.371 27.291,20.371 31.939,15.723 v1(33.299,15.723)
NetLight-_1: Light-.1 Light-.2 U1.71 | length 75.3
  Top Layer w0.254: v1(55.829,11.532) 55.938,11.423 55.938,10.712 57.172,9.478 ; Light-.1 57.172,9.478 ; Light-.2 66.272,10.03 65.43,10.871 58.566,10.871 57.172,9.478
  Bottom Layer w0.254: U1.71 17.297,11.278 17.297,9.754 18.669,8.382 33.539,8.382 40.689,15.532 40.689,15.598 47.839,22.748 52.817,22.748 55.956,19.609 55.956,11.659 v1(55.829,11.532)
NetPlace_1: Place.1 Place.2 U1.61 | length 38.5
  Top Layer w0.254: U1.61 18.085,23.19 18.085,17.689 21.362,14.412 cw(c20.429,11.686) 23.155,12.619 24.929,10.845 29.566,10.845 30.324,10.087 30.324,10.055 30.473,9.906 30.909,9.906 31.902,8.913 ; Place.1@32.258,7.653 31.902,8.008 31.902,8.913 ; Place.2 41.101,8.734 40.284,9.55 32.54,9.55 31.902,8.913
NetQ1_1: Q1.1 R2.1 | length 5.4
  Top Layer w0.254: Q1.1 25.613,17.265 25.613,16.881 27.848,14.646 R2.1
NetR2_2: R2.2 U1.65 | length 13.4
  Top Layer w0.254: v1(19.126,20.091) 19.171,20.091 25.475,13.788 25.475,13.429 R2.2
  Bottom Layer w0.254: U1.65 17.392,20.32 17.815,19.897 18.932,19.897 v1(19.126,20.091)
NetR3_1: R3.1 U1.50 | length 42.8
  Top Layer w0.254: U1.50 14.605,41.91 19.01,41.91 19.234,42.134 19.257,42.157 19.257,42.367 19.21,42.707 cw(c20.429,42.876) 20.599,44.096 20.938,44.048 21.149,44.048 21.171,44.071 22.642,45.542 28.867,45.542 29.502,44.907 35.89,44.907 36.271,44.526 39.7,44.526 41.351,42.875 42.846,42.875 43.735,43.764 44.642,43.764 45.339,43.067 45.339,39.384 43.596,37.64 R3.1
NetR78_1: R78.1 U1.28 | length 38.9
  Top Layer w0.254: R78.1 44.282,33.985 49.835,33.985 52.476,36.627 57.988,36.627 U1.28
NetR79_1: R79.1 U1.68 | length 77.2
  Top Layer w0.254: R79.1 43.393,26.012 43.768,25.637 44.289,25.637 48.194,21.732 v1(48.26,21.732)
  Bottom Layer w0.254: U1.68 11.201,15.646 11.201,4.267 12.319,3.15 48.111,3.15 48.26,3.298 v1(48.26,21.732)
NetR80_1: R80.1 U1.30 | length 36.2
  Top Layer w0.254: R80.1 43.443,29.591 62.484,29.591 U1.30
NetR81_1: R81.1 U1.64 | length 46.9
  Top Layer w0.254: v1(19.152,18.059) 19.155,18.059 25.862,11.353 28.701,11.353 29.616,12.268 29.616,14.148 32.614,17.145 34.468,17.145 38.989,21.666 43.18,21.666 43.393,21.879 R81.1
  Bottom Layer w0.254: U1.64 12.104,21.629 12.104,19.81 12.903,19.011 13.845,19.011 14.605,18.251 14.605,17.309 15.365,16.549 17.489,16.549 18.999,18.059 v1(19.152,18.059)
NetR82_1: R82.1 U1.32 | length 32.7
  Top Layer w0.254: R82.1 69.85,19.685 U1.32
NetR83_1: R83.1 U1.66 | length 23
  Top Layer w0.254: R83.1 31.521,11.643 v1(31.521,13.691)
  Bottom Layer w0.254: U1.66 14.58,19.075 26.137,19.075 v1(31.521,13.691)
NetR87_1: R87.1 U1.34 | length 40.7
  Top Layer w0.254: R87.1 57.744,46.383 69.037,35.089 v1(69.037,32.283)
  Bottom Layer w0.254: v1(69.037,32.283) 69.037,17.958 U1.34
NetReset_1: Reset.1 Reset.2 U1.67 | length 20.5
  Top Layer w0.254: U1.67 17.526,16.129 17.526,10.515 19.05,8.992 19.05,7.74 Reset.1 Reset.2
R/W: BC817.15 IC4.7 | length 5.7
  Top Layer w0.254: BC817.15 22.97,35.256 24.114,34.112 IC4.7
pads on no net: BC817. IC4.3 IC4.5 J1.3 U1.0 U1.1 U1.2 U1.3 U1.4 U1.5 U1.7 U1.9 U1.10 U1.11 U1.12 U1.13 U1.14 U1.15 U1.16 U1.18 U1.21 U1.23 U1.24 U1.25 U1.26 U1.27 U1.29 U1.31 U1.33 U1.35 U1.36 U1.37 U1.38 U1.39 U1.40 U1.41 U1.42 U1.43 U1.44 U1.45 U1.46 U1.48 U1.54 U1.55 U1.56 U1.57 U1.63 U1.69 U1.70 U1.72 U1.73 U1.74 U1.75 U1.76

## Polygon pours and split planes (outlines as drawn)
GND on Top Layer "GND" (solid, remove dead copper, pour order 0): 76.962,75.514 76.962,1.93 10.185,1.93 9.22,2.896 9.22,75.209 9.423,75.413 76.759,75.413
GND on Bottom Layer "GND" (solid, remove dead copper, pour order 1): 9.525,77.749 9.652,77.622 79.629,77.622 79.629,3.048 79.35,3.327 9.525,3.327

## Keep-outs
Keep-Out Layer:
  lines w2: 0,0 0,89.078 90.17,89.078 90.17,0 ; 0,0 90.17,0 ; 0,0 0,88.925 90.17,88.925 90.17,0 ; 0,0 90.17,0

## Other copper
Top Layer:
  text "Kiraly Krisztina" at 6.477,20.93 h1.52 r90
Bottom Layer:
  text "Kiraly Krisztina" at 4.089,21.209 h1.52 r270

## Silkscreen, mask and mechanical layers (free items; w line width, h text height)
Mechanical 1:
  the board outline again, w0.25

## Text inside footprints (layer, text, board x,y; h text height)
U1: Bottom Overlay "CN7" at 78.105,55.118 h1.52; Bottom Overlay "CN10" at 17.145,55.118 h1.52